# Altium PCB SSFocuser-B-TMC2208.PcbDoc
Units mm, origin at the board's own origin, x right, y up, seen from the top; angles counter-clockwise.
Board outline 40.02 x 40.01 mm, 2 copper layers (Top Layer, Bottom Layer); 47 components, 41 nets, 207 pads, 45 vias.
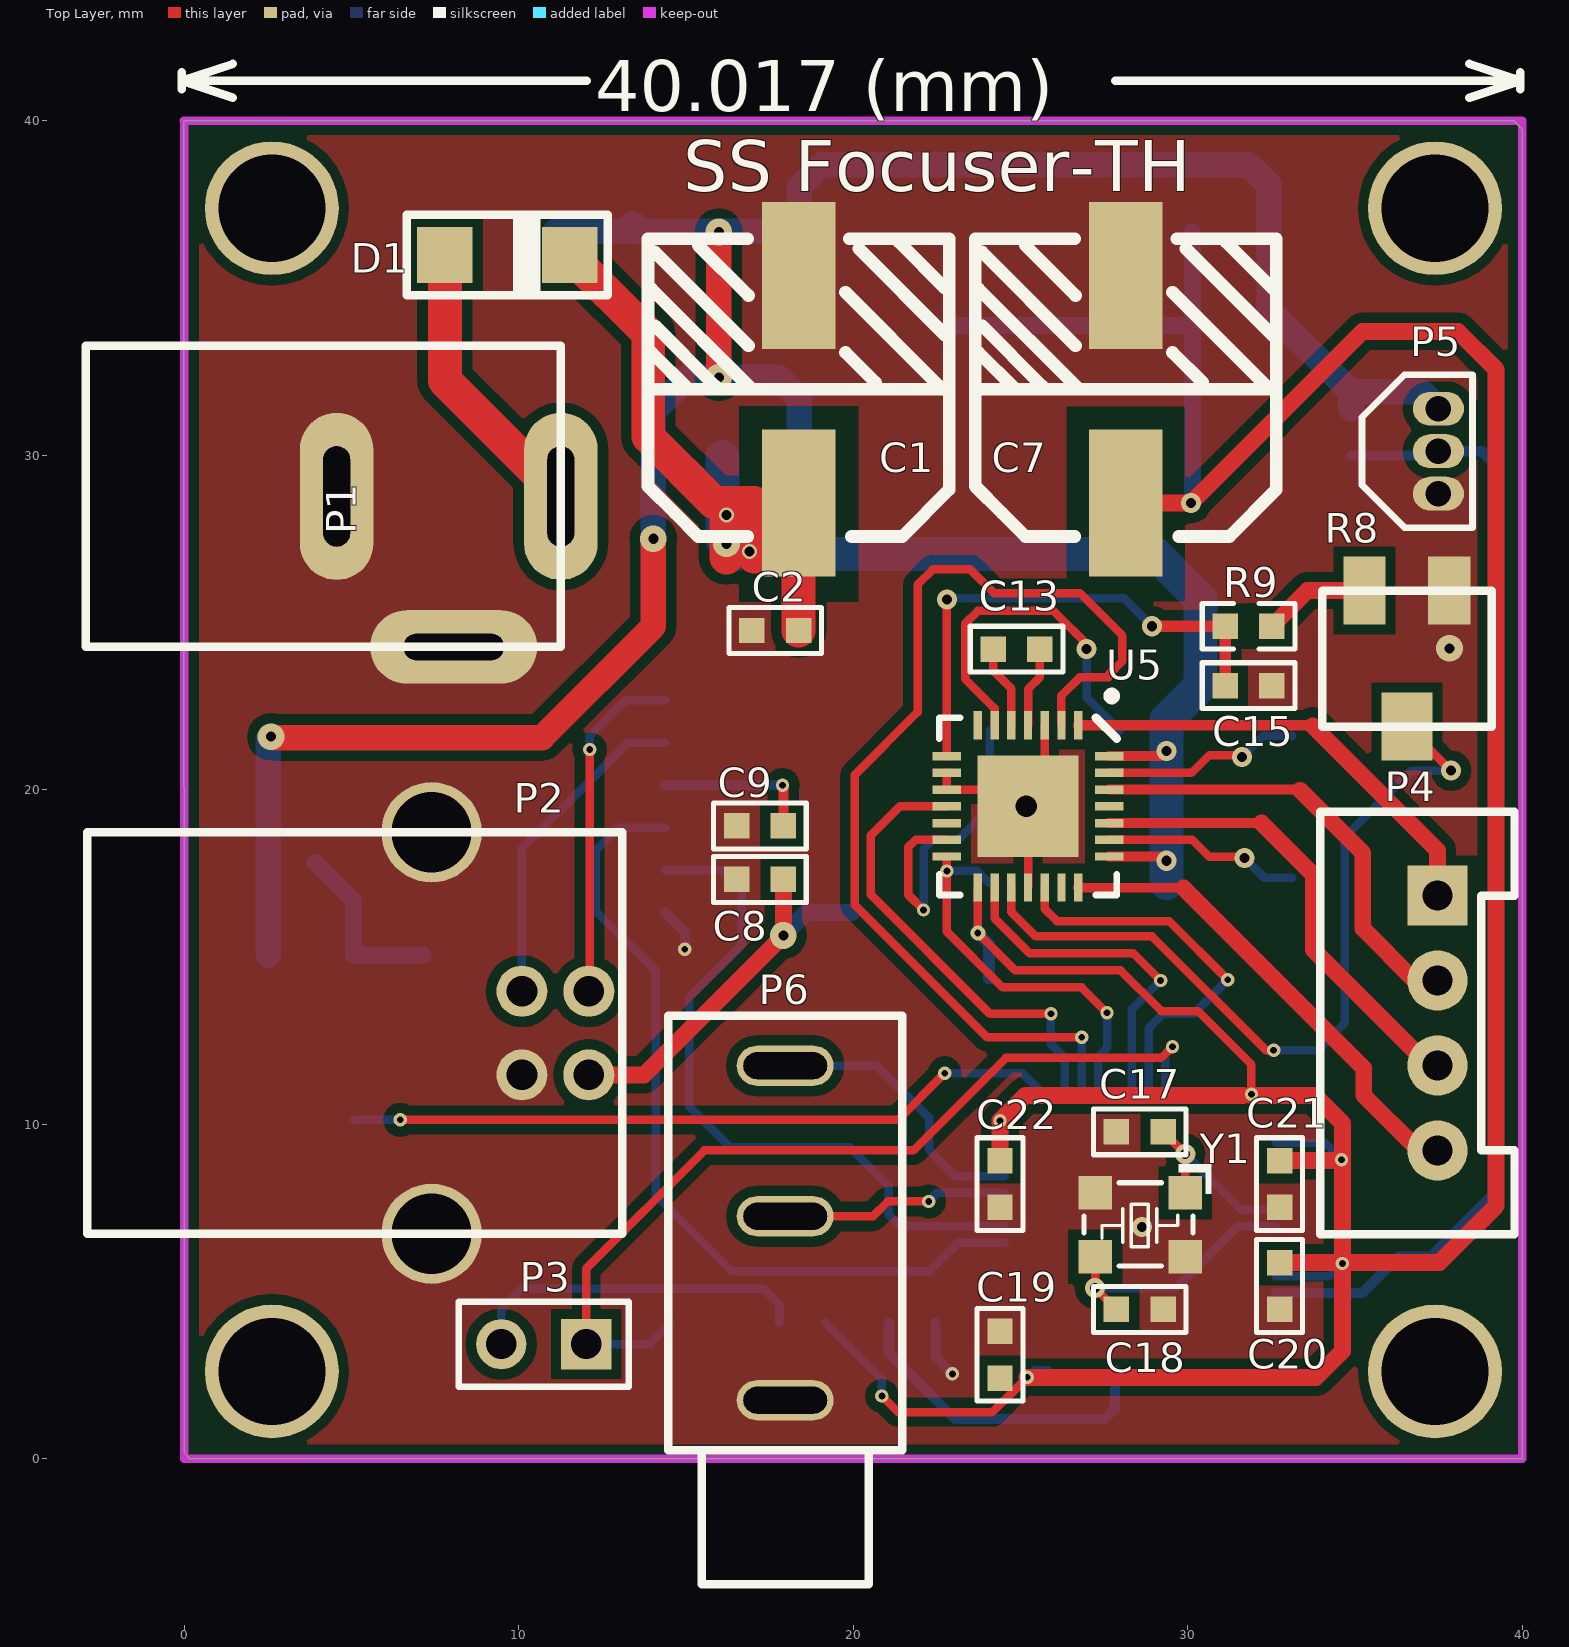
[diagram p0: Top Layer view]
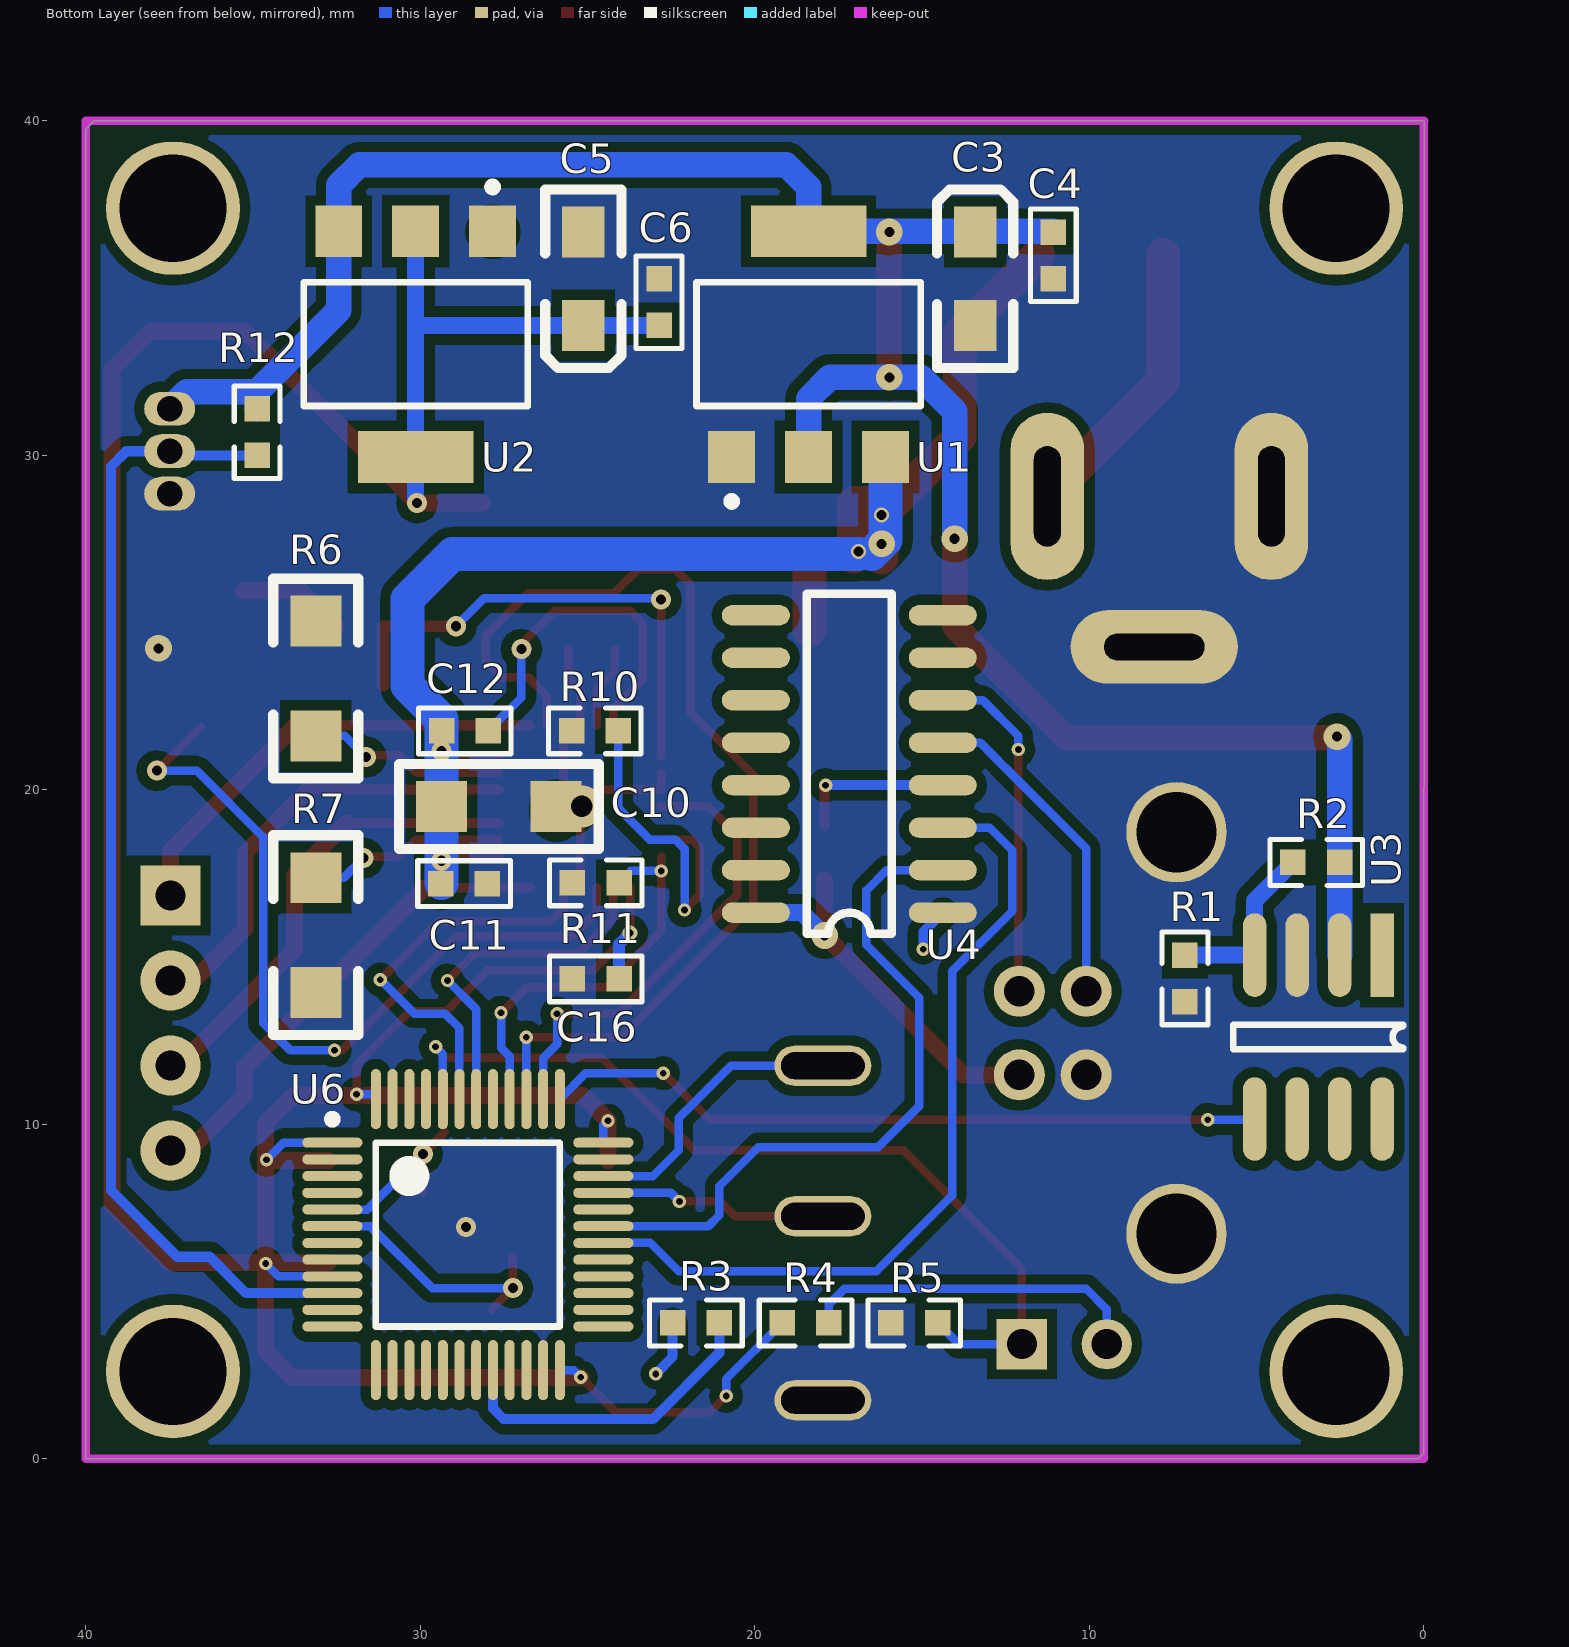
[diagram p1: Bottom Layer view, seen from below]

## Layer stack, top to bottom
Top Solder: solder mask 0.0102, Solder Resist, Dk 3.5
Top Layer: signal copper 0.0356
Dielectric1: dielectric 0.32, FR-4, Dk 4.8
Bottom Layer: signal copper 0.0356
Bottom Solder: solder mask 0.0102, Solder Resist, Dk 3.5

## Board outline
0,0.178 0.178,0 39.997,0 39.997,39.749 39.741,40.005 -0.02,40.005

## Design rules (kind name [scope] priority, off if disabled: settings)
Clearance Clearance_pyog [InPolygon] p1: gap=0.305
Clearance Clearance_mcu [InComponentClass('U7')] p2: gap=0.178
Clearance [All] p3: gap=0.178
HoleSize [All] p1: absolutevalues=TRUE maxlimit=25.4 minlimit=0.025 maxpercent=80.000 minpercent=20.000
MinimumSolderMaskSliver [All] p1: minsoldermaskwidth=0
PolygonConnect GNDVIA [IsVia] p1: connectstyle=Direct reliefconductorwidth=0.254 reliefentries=4 polygonreliefangle="90 Angle" airgapwidth=0.254
PolygonConnect [All] p2: connectstyle=Direct reliefconductorwidth=0.254 reliefentries=4 polygonreliefangle="90 Angle" airgapwidth=0.254
RoutingVias [All] p1: holewidth=0.711 width=1.27 viastyle="Through Hole" minholewidth=0.3 minwidth=0.45 maxholewidth=0.711 maxwidth=1.27
SilkToSilkClearance [All] p1: silktosilkclearance=0
SilkToSolderMaskClearance [IsPad] p1: minsilkscreentomaskgap=0 clearancetoexposedcopper=TRUE
SolderMaskExpansion [All] p1: expansion=0.102
Width [All] p1: maxlimit=1.27 minlimit=0.254 preferedwidth=0.254
25 further rules are at their usual default settings.

## Components (designator, comment, footprint, x,y, rotation, side; value= is the part's Value field where it differs from the comment)
C1 "470uF" 16V/470U(CD10X10D5) 18.364,31.979 r90 top
C2 "100nF" 0603C 16.967,24.765 r0 top
C3 "10uF" 3216 13.411,36.678 r90 bottom
C4 "100nF" 0603C 11.074,35.281 r90 bottom
C5 "10uF" 3216 25.121,33.884 r270 bottom
C6 "100nF" 0603C 22.86,35.281 r270 bottom
C7 "1000uF" 16V/470U(CD10X10D5) 28.143,31.979 r90 top
C8 "100nF" 0603C 16.51,17.323 r0 top
C9 "100nF" 0603C 16.51,18.923 r0 top
C10 "1uF" 1206C 29.362,19.507 r180 bottom
C11 "100nF" 0603C 27.991,17.196 r0 bottom
C12 "100nF" 0603C 27.965,21.768 r0 bottom
C13 "22nF" 0603C 24.181,24.206 r0 top
C15 "2.2~4.7uF" 0603C 32.512,23.114 r180 top
C16 "100nF" 0603C 25.451,14.351 r180 bottom
C17 "20pF" 0603C 29.261,9.779 r180 top
C18 "20pF" 0603C 27.864,4.47 r0 top
C19 "100nF" 0603C 24.384,3.81 r270 top
C20 "100nF" 0603C 32.741,4.47 r90 top
C21 "100nF" 0603C 32.741,7.518 r90 top
C22 "100nF" 0603C 24.384,7.518 r90 top
D1 "M7" DO-214AC 9.652,35.992 r0 top
P1 "SOURCE" DC_5.5MM -2.946,33.274 r0 top locked
P2 "USB-B" USB-B 12.09,11.481 r0 top locked
P3 "BOOT0" HDR1X2 12.014,3.429 r180 top
P4 "Header 4" XH_4_V 37.465,16.84 r270 top
P5 "DS18B20" TO-92B 37.49,31.394 r270 top
P6 "PJ316" PJ316 21.463,0.254 r90 top
R1 "2K" 0603R 7.137,15.062 r270 bottom
R2 "4.7K" 0603R 3.912,17.831 r180 bottom
R3 "10K" 0603R 22.454,4.064 r180 bottom
R4 "4.7K" 0603R 17.78,4.064 r0 bottom
R5 "10K" 0603R 14.529,4.064 r0 bottom
R6 "0.18Ω" 1206R 33.122,25.044 r270 bottom
R7 "0.18Ω" 1206R 33.122,13.945 r90 bottom
R8 "RPot" VR_SMD 36.551,23.927 r180 top
R9 "20K" 0603R 31.115,24.892 r0 top
R10 "20K" 0603R 25.476,21.768 r180 bottom
R11 "20K" 0603R 25.451,17.221 r180 bottom
R12 "4.7K" 0603R 34.874,29.997 r90 bottom
U1 "AMS1117-5.0" SOT223 18.39,33.325 r180 bottom
U2 "AMS1117-3.3" SOT223 30.136,33.325 r0 bottom
U3 "MAX813LCSA" SOP-8 1.245,15.062 r270 bottom
U4 "CH340C" SO-16 14.376,16.332 r0 bottom
U5 "TMC2208" QFN28 25.222,19.507 r270 top
U6 "STM32F103C8T6" LQFP48_N 28.575,6.706 r270 bottom
Y1 "8MHz  无源" X3225 29.896,7.976 r180 top (schematic designator Y2)

## Footprints (in the part's own frame and the unit in brackets; to place one, negate y for a bottom-side part, rotate by r counter-clockwise, add the part's x,y. Pads: shape width x height; smd on the part's side, far side on the other; paste and mask are expansions set on the pad)
16V/470U(CD10X10D5) [mm] "取自《FE-3AD》"
  rect 4.4x2.2 smd: 1(-3.4,0) 2(3.4,0)
  Top Layer pour cut-out: -6.35,1.778 -0.508,1.778 -0.508,-1.778 -6.35,-1.778
  silkscreen extent -4.4,-4.5 4.5,4.5
0603C [mil]
  rect 30x30 smd: 1(0,0) 2(55,0)
  silkscreen extent -27,-27 82,27, body extent -4,-16 58,16, height 12
0603R [mil]
  rect 30x30 smd: 1(0,0) 2(55,0)
  silkscreen extent -27,-27 82,27, body extent -4,-18 58,16, height 18
1206C [mil]
  rect 60x60 smd: 1(0,0) 2(135,0)
  silkscreen extent -50,-50 185,50, body extent 6,-33 132,29, height 40
1206R [mil]
  rect 60x60 smd: 1(0,0) 2(135,0)
  silkscreen extent -50,-50 185,50, body extent 5,-32 131,30, height 22
3216 [mil]
  rect 60x50 smd: 1(0,0) 2(-110,0)
  silkscreen extent -160,-45 50,45, body extent -151,-35 38,36, height 73
DC_5.5MM [mm]
  oval 2.2x5 hole 0.8 slot 3 at 90 deg: 1(14.2,-4.5) 2(7.5,-4.5)
  oval 5x2.2 hole 0.8 slot 3 at 0 deg: 3(11,-9)
  silkscreen extent 0,-9 14.2,0, body extent -0.1,-8.88 14.1,-0.12, height 10.82
DO-214AC [mm]
  rect 1.655x1.67 smd: 1(1.865,0) 2(-1.865,0)
  silkscreen extent -3,-1.2 3,1.2, body extent -2.74,-1.4 2.74,1.4, height 2.3
HDR1X2 [mm] "Connector; Header; 2 Position"
  rect 1.5x1.5 hole 0.9: 1(0,0)
  round 1.5 hole 0.9: 2(2.54,0)
  silkscreen extent -1.27,-1.27 3.81,1.27, body extent -1.27,-1.27 3.81,1.27, height 7.58
LQFP48_N [mm]
  oval 0.3x1.8 smd: 1(-2.75,-4.05) 2(-2.25,-4.05) 3(-1.75,-4.05) 4(-1.25,-4.05) 5(-0.75,-4.05) 6(-0.25,-4.05) 7(0.25,-4.05) 8(0.75,-4.05) 9(1.25,-4.05) 10(1.75,-4.05) 11(2.25,-4.05) 12(2.75,-4.05) 25(2.75,4.05) 26(2.25,4.05) 27(1.75,4.05) 28(1.25,4.05) 29(0.75,4.05) 30(0.25,4.05) 31(-0.25,4.05) 32(-0.75,4.05) 33(-1.25,4.05) 34(-1.75,4.05) 35(-2.25,4.05) 36(-2.75,4.05)
  oval 1.8x0.3 smd: 13(4.05,-2.75) 14(4.05,-2.25) 15(4.05,-1.75) 16(4.05,-1.25) 17(4.05,-0.75) 18(4.05,-0.25) 19(4.05,0.25) 20(4.05,0.75) 21(4.05,1.25) 22(4.05,1.75) 23(4.05,2.25) 24(4.05,2.75) 37(-4.05,2.75) 38(-4.05,2.25) 39(-4.05,1.75) 40(-4.05,1.25) 41(-4.05,0.75) 42(-4.05,0.25) 43(-4.05,-0.25) 44(-4.05,-0.75) 45(-4.05,-1.25) 46(-4.05,-1.75) 47(-4.05,-2.25) 48(-4.05,-2.75)
  silkscreen extent -3.57,-4.18 2.75,2.75, body extent -4.5,-4.5 4.5,4.5, height 1.5
PJ316 [mm] "PJ316"
  oval 1.2x2.9 hole 0.8 slot 2.5 at 90 deg: 1(1.5,3.5) 2(7,3.5) 3(11.5,3.5)
  silkscreen extent -4,0 13,7
QFN28 [mm] "5mm*5mm（蒜米工坊）"
  rect 0.85x0.25 smd: 1(-2.425,1.5) 2(-2.425,1) 3(-2.425,0.5) 4(-2.425,0) 5(-2.425,-0.5) 6(-2.425,-1) 7(-2.425,-1.5) 15(2.425,-1.5) 16(2.425,-1) 17(2.425,-0.5) 18(2.425,0) 19(2.425,0.5) 20(2.425,1) 21(2.425,1.5)
  rect 0.25x0.85 smd: 8(-1.5,-2.425) 9(-1,-2.425) 10(-0.5,-2.425) 11(0,-2.425) 12(0.5,-2.425) 13(1,-2.425) 14(1.5,-2.425) 22(1.5,2.425) 23(1,2.425) 24(0.5,2.425) 25(0,2.425) 26(-0.5,2.425) 27(-1,2.425) 28(-1.5,2.425)
  rect 3.03x3.03 smd: 29(0,0)
  silkscreen extent -3.42,-2.65 2.65,2.65, body extent -2.49,-2.52 2.55,2.52, height 0.9
SO-16 [mil]
  oval 80x24 smd: 1(0,0) 2(0,-50) 3(0,-100) 4(0,-150) 5(0,-200) 6(0,-250) 7(0,-300) 8(0,-350) 9(220,-350) 10(220,-300) 11(220,-250) 12(220,-200) 13(220,-150) 14(220,-100) 15(220,-50) 16(220,0)
  silkscreen extent 60,-375 160,25, body extent -12,-377 226,29, height 77
SOP-8 [mm]
  rect 2.5x0.7 smd: 1(0,0)
  oval 2.5x0.7 smd: 2(0,-1.27) 3(0,-2.54) 4(0,-3.81) 5(4.9,-3.81) 6(4.9,-2.54) 7(4.9,-1.27) 8(4.9,0)
  silkscreen extent 2.08,-4.45 2.82,0.63, body extent -0.56,-4.44 5.48,0.58, height 1.6
SOT223 [mm] "SOT-223/SC-73; 4 Leads; Body 6.7 x 7.3 mm, inc. leads (LxW max)"
  rect 1.4x1.55 smd: 1(-2.3,-3.375) 2(0,-3.375) 3(2.3,-3.375)
  rect 3.45x1.55 smd: 4(0,3.375)
  silkscreen extent -3.35,-4.82 3.35,1.85, body extent -3.25,-3.53 3.25,3.43, height 1.7
TO-92B [mil]
  oval 40x60 hole 30: 1(0,0) 2(50,0) 3(100,0)
  silkscreen extent -40,-90 140,40
USB-B [mm]
  round 1.524 hole 0.92: 1(0,0) 2(0,2.5) 3(-2,2.5) 4(-2,0)
  round 3 hole 2.4: 5(-4.7,7.25) 6(-4.7,-4.75)
  silkscreen extent -15,-4.75 1,7.25
VR_SMD [mil]
  rect 50x80 smd: 1(-50,-80) 2(50,-80)
  rect 60x80 smd: 3(0,80)
  silkscreen extent -100,-80 100,80
X3225 [mm]
  rect 1x1 smd: 1(-0.025,0.025) 2(2.667,0.025) 3(2.667,1.93) 4(-0.025,1.93)
  silkscreen extent -0.81,-0.84 3,2.21, body extent -0.23,-0.29 2.97,2.21, height 0.72
XH_4_V [mm]
  rect 1.8x1.8 hole 0.9: 1(0,0)
  round 1.8 hole 0.9: 2(2.54,0) 3(5.08,0) 4(7.62,0)
  silkscreen extent -2.5,-3.5 10.12,2.3, body extent -2.39,-3.35 10.01,2.75, height 7

## Part data
C1: library part C470UF016S, "470UF      16V      CD10X10D5"
C2 C4 C6 C8 C10 C11 C12 C13 C15 C16 C17 C18 C19 C20 C21 C22: library part Cap, "Capacitor"
C3 C5 C7: library part CAP2
C9: library part C
D1: library part Diode, "High Conductance Fast Diode"
P3: library part MHDR1X2, "Header, 2-Pin"
P4: "Header, 4-Pin"
P5: library part "Header 3", "Header, 3-Pin"
R1 R2 R5 R6 R7 R9 R10 R11 R12: library part RES, "Resistor"
R3 R4: library part R
R8: "Potentiometer"
U1 U2: library part AMS1117
U3: library part MAX813L
U4: library part CH340G, "USB2UART"
U6: "STM32 ARM-based 32-bit MCU Performance Line with 64 kB Flash, 20 kB Internal RAM, -40 to +85癈 Temperature, 48-Pin LQFP, Tray"
Y1: library part XTAL_1, "Crystal Oscillator"

## Free pads (board coordinates)
  round 4 hole 3.2: 0(2.616,2.616) 1(37.389,2.616) 2(37.389,37.389) 3(2.616,37.389)

## Via types
v1: diameter 0.4, hole 0.2, Top Layer to Bottom Layer, 22 vias
v2: diameter 0.6, hole 0.3, Top Layer to Bottom Layer, 12 vias
v3: diameter 0.8, hole 0.3, Top Layer to Bottom Layer, 7 vias
v4: diameter 0.45, hole 0.3, Top Layer to Bottom Layer, 2 vias
v5: diameter 0.45, hole 0.2, Top Layer to Bottom Layer, 1 vias
v6: diameter 1.25, hole 0.65, Top Layer to Bottom Layer, 1 vias

## Nets (pads, with @x,y where several pads share a name; then routed paths per layer and width w, separated by ;. In a path a pad name is that pad's centre, name@x,y a point inside that pad or via, vN(x,y) a via of type N, cw(c..) or ccw(c..) an arc to the next point about the centre after c; other vN are vias at no path point)
A1: P4.3 U5.24 | length 14.1
  Top Layer w0.3: U5.24 32.199,19.007
  Top Layer w0.5: 32.199,19.007 33.757,17.45 33.757,15.215 37.211,11.76 P4.3
A2: P4.4 U5.21 | length 14.5
  Top Layer w0.3: U5.21 29.868,17.069
  Top Layer w0.5: 29.868,17.072 35.255,11.684 35.255,10.871 36.906,9.22 P4.4
B1: P4.2 U5.26 | length 13.5
  Top Layer w0.3: U5.26 33.35,20.007
  Top Layer w0.5: 33.35,19.99 35.23,18.11 35.23,15.85 36.779,14.3 P4.2
B2: P4.1 U5.1 | length 13.6
  Top Layer w0.3: U5.1 33.731,21.932
  Top Layer w0.5: 33.731,21.92 37.465,18.186 P4.1
BOOT0: P3.1 R5.1 U6.44 | length 27
  Top Layer w0.254: P3.1 12.014,5.69 15.545,9.22 21.793,9.22 24.562,11.989 29.21,11.989 v1(29.54,12.319)
  Bottom Layer w0.254: P3.1 13.894,3.429 R5.1 ; U6.44 29.325,12.104 v1(29.54,12.319)
BOOT1: R3.2 U6.20 | length 9.8
  Bottom Layer w0.305: R3.2 21.057,3.175 23.038,1.194 27.508,1.194 27.825,1.511 U6.20
D3V3: C5.1 C6.2 C7.1 C16.2 C19.2 C20.2 C21.2 C22.2 R4.2 U2.2 U2.4 U5.15 U6.1 U6.9 U6.24 U6.36 U6.48 | length 119.6
  Top Layer w0.254: v1(20.853,1.88) 21.336,1.397 24.155,1.397 v1(25.197,2.438) ; U5.15 v5(23.722,15.724) 24.841,14.605 27.991,14.605 29.21,13.386 30.302,13.386 31.902,11.786 31.902,10.871 31.648,10.871
  Top Layer w0.508: C22.2 v1(24.384,10.109) 25.146,10.871 31.648,10.871 ; v1(25.197,2.438) 33.833,2.438 34.62,3.226 v1@34.62,5.867 ; C7.1 v2(30.095,28.579) 35.223,33.706 38.075,33.706 39.218,32.563 39.218,7.569 37.516,5.867 v1@34.62,5.867 ; v1@31.902,10.871 33.782,10.871 34.62,10.033 v1@34.62,5.867 ; C20.2 v1@34.62,5.867 ; C21.2 v1@34.544,8.915
  Bottom Layer w0.254: R4.2 20.853,2.388 v1(20.853,1.88) ; v1(24.384,10.109) 24.525,9.968 U6.36 ; v1(25.197,2.438) 25.414,2.656 U6.24 ; U6.48 31.466,10.897 v1(31.902,10.897) ; U6.9 34.234,5.456 v1(34.62,5.842) ; U6.1 34.08,9.456 v1(34.595,8.941)
  Bottom Layer w0.35: v5(23.722,15.724) 24.054,15.392 C16.2
  Bottom Layer w0.508: C6.2 C5.1 30.11,33.884 30.136,33.909 ; v2@30.136,28.586 U2.4 30.136,33.909 ; U2.2 30.136,33.909
D5V0: C3.1 C4.2 P5.1 R2.2 R12.2 U1.2 U1.4 U2.3 U3.2 | length 70.7
  Top Layer w0.762: v3@2.692,21.565 10.693,21.565 14.021,24.892 v3(14.021,27.508) ; v3(15.977,32.334) v3(15.977,36.678)
  Bottom Layer w0.762: U3.2 R2.2 v3@2.515,21.514 ; C4.2@11.097,36.7 C3.1@13.411,36.7 ; C3.1 C3.1@13.411,36.7 ; C3.1@13.411,36.932 C3.1@13.411,36.7 ; v3(14.021,27.508) 14.021,31.318 15.037,32.334 v3(15.977,32.334) 17.755,32.334 18.39,31.699 U1.2 ; R12.2 34.874,31.902 ; P5.1 36.982,31.902 34.874,31.902 ; C3.1@13.411,36.7 U1.4 18.39,38.024 19.05,38.684 31.826,38.684 32.436,38.075 U2.3 32.436,34.341 34.874,31.902
  other v3: 2.591,21.59
D12V0: C1.1 C2.2 C10.1 C11.2 C12.2 D1.1 U1.3 U5.22 U5.28 | length 45.1
  Top Layer w0.3: U5.22 29.237,18.007 v2(29.362,17.882) ; U5.28 29.211,21.007 v2(29.362,21.158)
  Top Layer w1: D1.1 13.868,33.64 13.868,30.556 15.846,28.579 17.043,28.579 v4@17.043,26.975
  Top Layer w1.016: 16.205,26.949 v4(16.205,28.219) ; C2.2 C1.1@18.364,27.026
  Bottom Layer w1.016: U1.3 16.09,27.471 v3(16.205,27.356) 16.51,27.051 ; v4@16.891,27.051 29.032,27.051 30.378,25.705 30.378,23.114 29.362,22.098 C12.2 v2(29.362,21.158) C10.1 v2(29.362,17.882) C11.2@29.362,17.221
  other v4: 16.891,27.127
DIAG: U5.11 U6.38 | length 14
  Top Layer w0.254: U5.11 21.387,19.507 20.523,18.644 20.523,16.866 24.079,13.31 v1(25.908,13.31)
  Bottom Layer w0.254: v1(25.908,13.31) 25.908,12.395 26.325,11.978 U6.38
DIR: U5.19 U6.43 | length 12.1
  Top Layer w0.254: U5.19 25.722,16.442 26.086,16.078 29.439,16.078 v1(31.191,14.326)
  Bottom Layer w0.254: U6.43@28.829,10.756 28.829,12.878 29.261,13.31 30.175,13.31 v1(31.191,14.326)
DOWN: P6.3 U6.34 | length 8.5
  Bottom Layer w0.254: P6.3@17.983,11.753 20.709,11.753 22.276,10.185 22.276,9.22 23.04,8.456 U6.34
EN: U5.2 U6.39 | length 31.7
  Top Layer w0.254: U5.2 26.222,22.819 26.772,23.368 27.635,23.368 27.635,23.444 28.042,23.851 28.042,24.613 26.772,25.883 24.206,25.883 23.495,26.594 22.377,26.594 21.92,26.137 21.92,22.327 20.041,20.447 20.041,16.561 24,12.601 v1(26.825,12.601)
  Bottom Layer w0.254: U6.39 v1(26.825,12.601)
GND: C1.2 C2.1 C3.2 C4.1 C5.2 C6.1 C7.2 C8.1 C9.1 C10.2 C11.1 C15.1 C16.1 C17.2 C18.2 C19.1 C20.1 C21.1 C22.1 P1.2 P1.3 P2.4 P2.5 P2.6 P5.3 P6.1 R1.2 R3.1 R5.2 R6.1 R7.1 R8.1 R10.1 R11.1 U1.1 U2.1 U3.3 U4.1 U5.3 U5.9 U5.10 U5.18 U5.29 U6.8 U6.23 U6.35 U6.47 Y1.2 Y1.4 | length 13.7
  Top Layer w0.254: U5.9 U5.10 24.722,20.007 U5.29 ; U5.18 U5.29 ; U5.3 25.722,20.007 U5.29
  Top Layer w1: P1.2@4.554,27.774 P1.2 ; P2.5@6.745,18.731 P2.5
  Bottom Layer w0.3: U4.1 14.961,15.748 v1(14.961,15.24) ; R3.1 22.454,3.048 v1(22.962,2.54)
  Bottom Layer w0.5: P2.6 P2.6@7.467,6.807
  Bottom Layer w0.6: v6(25.171,19.507) C10.2@25.451,19.228
  Bottom Layer w1: C10.2@25.933,19.253 C10.2 ; U2.1@27.813,36.678 U2.1
  other v2: 28.626,6.934
  other v3: 37.821,24.232
INDEX: U5.12
NetC9_2: C9.2 U4.4 | length 4.7
  Top Layer w0.3: C9.2 v1@17.907,20.117
  Bottom Layer w0.3: U4.4 v1(17.882,20.142)
NetC12_1: C12.1 U5.6 | length 10.6
  Top Layer w0.254: U5.6 24.222,22.438 23.343,23.317 23.343,24.968 23.724,25.349 25.984,25.349 v2@27.051,24.282
  Bottom Layer w0.254: v2@26.797,24.206 26.975,24.028 26.975,22.758 C12.1
  other v2: 26.975,24.206
NetC13_1: C13.1 U5.5 | length 2.5
  Top Layer w0.254: C13.1 24.181,23.571 24.722,23.03 U5.5
NetC13_2: C13.2 U5.4 | length 2.4
  Top Layer w0.254: U5.4 25.222,23.012 25.578,23.368 C13.2
NetC15_2: C15.2 R9.1 U5.8 | length 15.2
  Top Layer w0.254: v2@22.758,25.73 22.758,25.691 22.797,25.653 U5.8
  Top Layer w0.35: v2(28.931,24.892) R9.1 C15.2
  Bottom Layer w0.254: v2@22.758,25.717 22.771,25.73 28.092,25.73 v2(28.931,24.892)
  other v2: 22.797,25.691
NetD1_1: D1.2 P1.1 | length 8.7
  Top Layer w1.016: D1.2 7.787,32.241 P1.1
NetP2_2: P2.2 U4.6 | length 10.4
  Top Layer w0.254: v1@12.065,21.158 v1(12.116,21.209) 12.116,14.006 P2.2
  Bottom Layer w0.254: v1(12.116,21.209) 12.116,21.615 13.183,22.682 U4.6
NetP2_3: P2.3 U4.5 | length 9.9
  Bottom Layer w0.254: P2.3 10.09,18.244 12.525,20.679 12.528,20.679 12.824,20.975 12.824,20.977 13.259,21.412 U4.5
NetP3_2: P3.2 R4.1 | length 10.3
  Bottom Layer w0.254: P3.2 9.474,4.47 10.084,5.08 17.323,5.08 17.78,4.623 R4.1
NetR1_1: R1.1 R2.1 U3.4 | length 5.3
  Bottom Layer w0.508: R2.1 5.055,16.688 U3.4 R1.1
NetR6_2: R6.2 U5.27 | length 6
  Top Layer w0.254: U5.27 30.108,20.507 30.632,21.031 v2@31.648,21.031
  Bottom Layer w0.254: v2(31.619,20.984) 32.251,21.615 R6.2
NetR7_2: R7.2 U5.23 | length 6
  Top Layer w0.254: U5.23 30.134,18.507 30.632,18.009 v2@31.725,18.009
  Bottom Layer w0.254: v2(31.696,17.961) 32.283,17.374 R7.2
NetR8_2: R8.2 R9.2 | length 3.2
  Top Layer w0.5: R9.2 33.579,25.959 R8.2
NetR10_2: R10.2 U5.13 | length 9.9
  Top Layer w0.254: v1(22.098,16.408) 21.641,16.866 21.641,18.288 21.86,18.507 U5.13
  Bottom Layer w0.254: v1(22.098,16.408) 22.098,18.237 22.377,18.517 23.139,18.517 24.079,19.456 R10.2
OSC_IN: C17.1 U6.5 Y1.1 | length 5.5
  Top Layer w0.254: C17.1 v2(29.921,9.119) Y1.1
  Bottom Layer w0.254: v2(29.921,9.119) 31.584,7.456 U6.5
OSC_OUT: C18.1 U6.6 Y1.3 | length 8
  Top Layer w0.254: Y1.3 v2(27.229,5.105) C18.1
  Bottom Layer w0.254: v2(27.229,5.105) 29.642,5.105 31.492,6.956 U6.6
PDN: R11.2 U5.14 U6.40 | length 12.1
  Top Layer w0.254: U5.14 v1(22.797,17.577) 22.797,15.76 24.46,14.097 26.822,14.097 v1(27.584,13.335)
  Bottom Layer w0.254: v1(22.797,17.577) 23.698,17.577 R11.2 ; U6.40 27.325,12.034 27.584,12.294 v1(27.584,13.335)
PFO: U3.5 U6.37 | length 21.6
  Top Layer w0.254: v1(6.452,10.135) 21.336,10.135 v1(22.733,11.532)
  Bottom Layer w0.254: U3.5@5.082,10.135 v1(6.452,10.135) ; v1(22.733,11.532) 25.049,11.532 U6.37
RESET: U6.7
RXD: U4.3 U6.30 | length 25.1
  Bottom Layer w0.254: U4.3 12.979,18.872 12.294,18.186 12.294,16.383 14.097,14.58 14.097,7.874 16.358,5.613 22.277,5.613 23.119,6.456 U6.30
STEP: U5.16 U6.42 | length 10.6
  Top Layer w0.254: U5.16 24.222,16.164 25.273,15.113 28.372,15.113 v1(29.185,14.3)
  Bottom Layer w0.254: U6.42 28.325,13.441 v1(29.185,14.3)
TEMP: P5.2 R12.1 U6.10 | length 34.1
  Bottom Layer w0.305: U6.10 35.207,4.956 36.297,6.045 37.262,6.045 39.243,8.026 39.243,29.667 38.786,30.124 P5.2 37.363,29.997 R12.1
TXD: U4.2 U6.31 | length 21.1
  Bottom Layer w0.254: U4.2 16.053,17.602 16.662,16.993 16.662,15.367 15.088,13.792 15.088,10.541 16.307,9.322 19.888,9.322 21.057,8.153 21.057,7.29 21.391,6.956 U6.31
UP: P6.2 U6.33 | length 6.8
  Top Layer w0.254: P6.2@17.983,7.253 20.588,7.253 21.031,7.696 v1(22.25,7.696)
  Bottom Layer w0.254: v1(22.25,7.696) 22.51,7.956 U6.33
VBUS: C8.2 P2.1 U4.16 | length 11.6
  Top Layer w0.508: P2.1 13.741,11.481 v3(17.907,15.646) C8.2
  Bottom Layer w0.508: v3(17.907,15.646) 18.593,16.332 U4.16
VREF: R8.3 U5.17 | length 24.2
  Top Layer w0.254: U5.17 24.722,16.35 25.451,15.621 28.931,15.621 32.334,12.217 v1(32.563,12.217) ; R8.3 v2(37.871,20.574)
  Bottom Layer w0.254: v1(32.563,12.217) 33.884,12.217 34.696,13.03 34.696,18.593 36.678,20.574 v2(37.871,20.574)
pads on no net: U3.1 U3.6 U3.7 U3.8 U4.7 U4.8 U4.9 U4.10 U4.11 U4.12 U4.13 U4.14 U4.15 U5.7 U5.20 U5.25 U6.2 U6.3 U6.4 U6.11 U6.12 U6.13 U6.14 U6.15 U6.16 U6.17 U6.18 U6.19 U6.21 U6.22 U6.25 U6.26 U6.27 U6.28 U6.29 U6.32 U6.41 U6.45 U6.46

## Polygon pours and split planes (outlines as drawn)
GND on Bottom Layer "Bottom Layer-No Net" (solid, remove dead copper, pour order 8): 0,0.076 0.076,0 39.997,0 39.997,39.749 39.869,39.877 39.741,40.005 0,40.005
GND on Top Layer "Bottom Layer-No Net" (solid, remove dead copper, pour order 10): 0,0 39.997,0 39.869,0.128 39.869,39.877 0.128,39.877 0,40.005

## Keep-outs
Keep-Out Layer:
  lines w0.254: -0.02,40.005 39.997,40.005 39.997,0 0,0 0,40.005

## Silkscreen, mask and mechanical layers (free items; w line width, h text height)
Top Overlay:
  lines w0.254: -0.076,40.945 -0.076,41.453 ; 1.448,40.691 -0.076,41.199 ; 1.448,41.707 -0.076,41.199 ; 12.035,41.199 -0.076,41.199 ; 27.829,41.199 39.941,41.199 ; 38.417,40.691 39.941,41.199 ; 38.417,41.707 39.941,41.199 ; 39.941,40.945 39.941,41.453
  text "40.017 (mm)" at 12.289,40.285 h1.52
  text "SS Focuser-TH" at 14.91,37.897 h1.52

## Dimensions
39.997,40.005 to 39.997,0 on Top Overlay